# Altium PCB praline.PcbDoc (part 7 of 8)
Units mm, origin at the board's own origin, x right, y up, seen from the top; angles counter-clockwise.
Board outline 152.4 x 101.6 mm, 6 copper layers (In2.Cu, F.Cu, B.Cu, In1.Cu, In3.Cu, In4.Cu); 581 components, 490 nets, 2812 pads, 953 vias.
Unrouted connection lines stored in the file: 404.
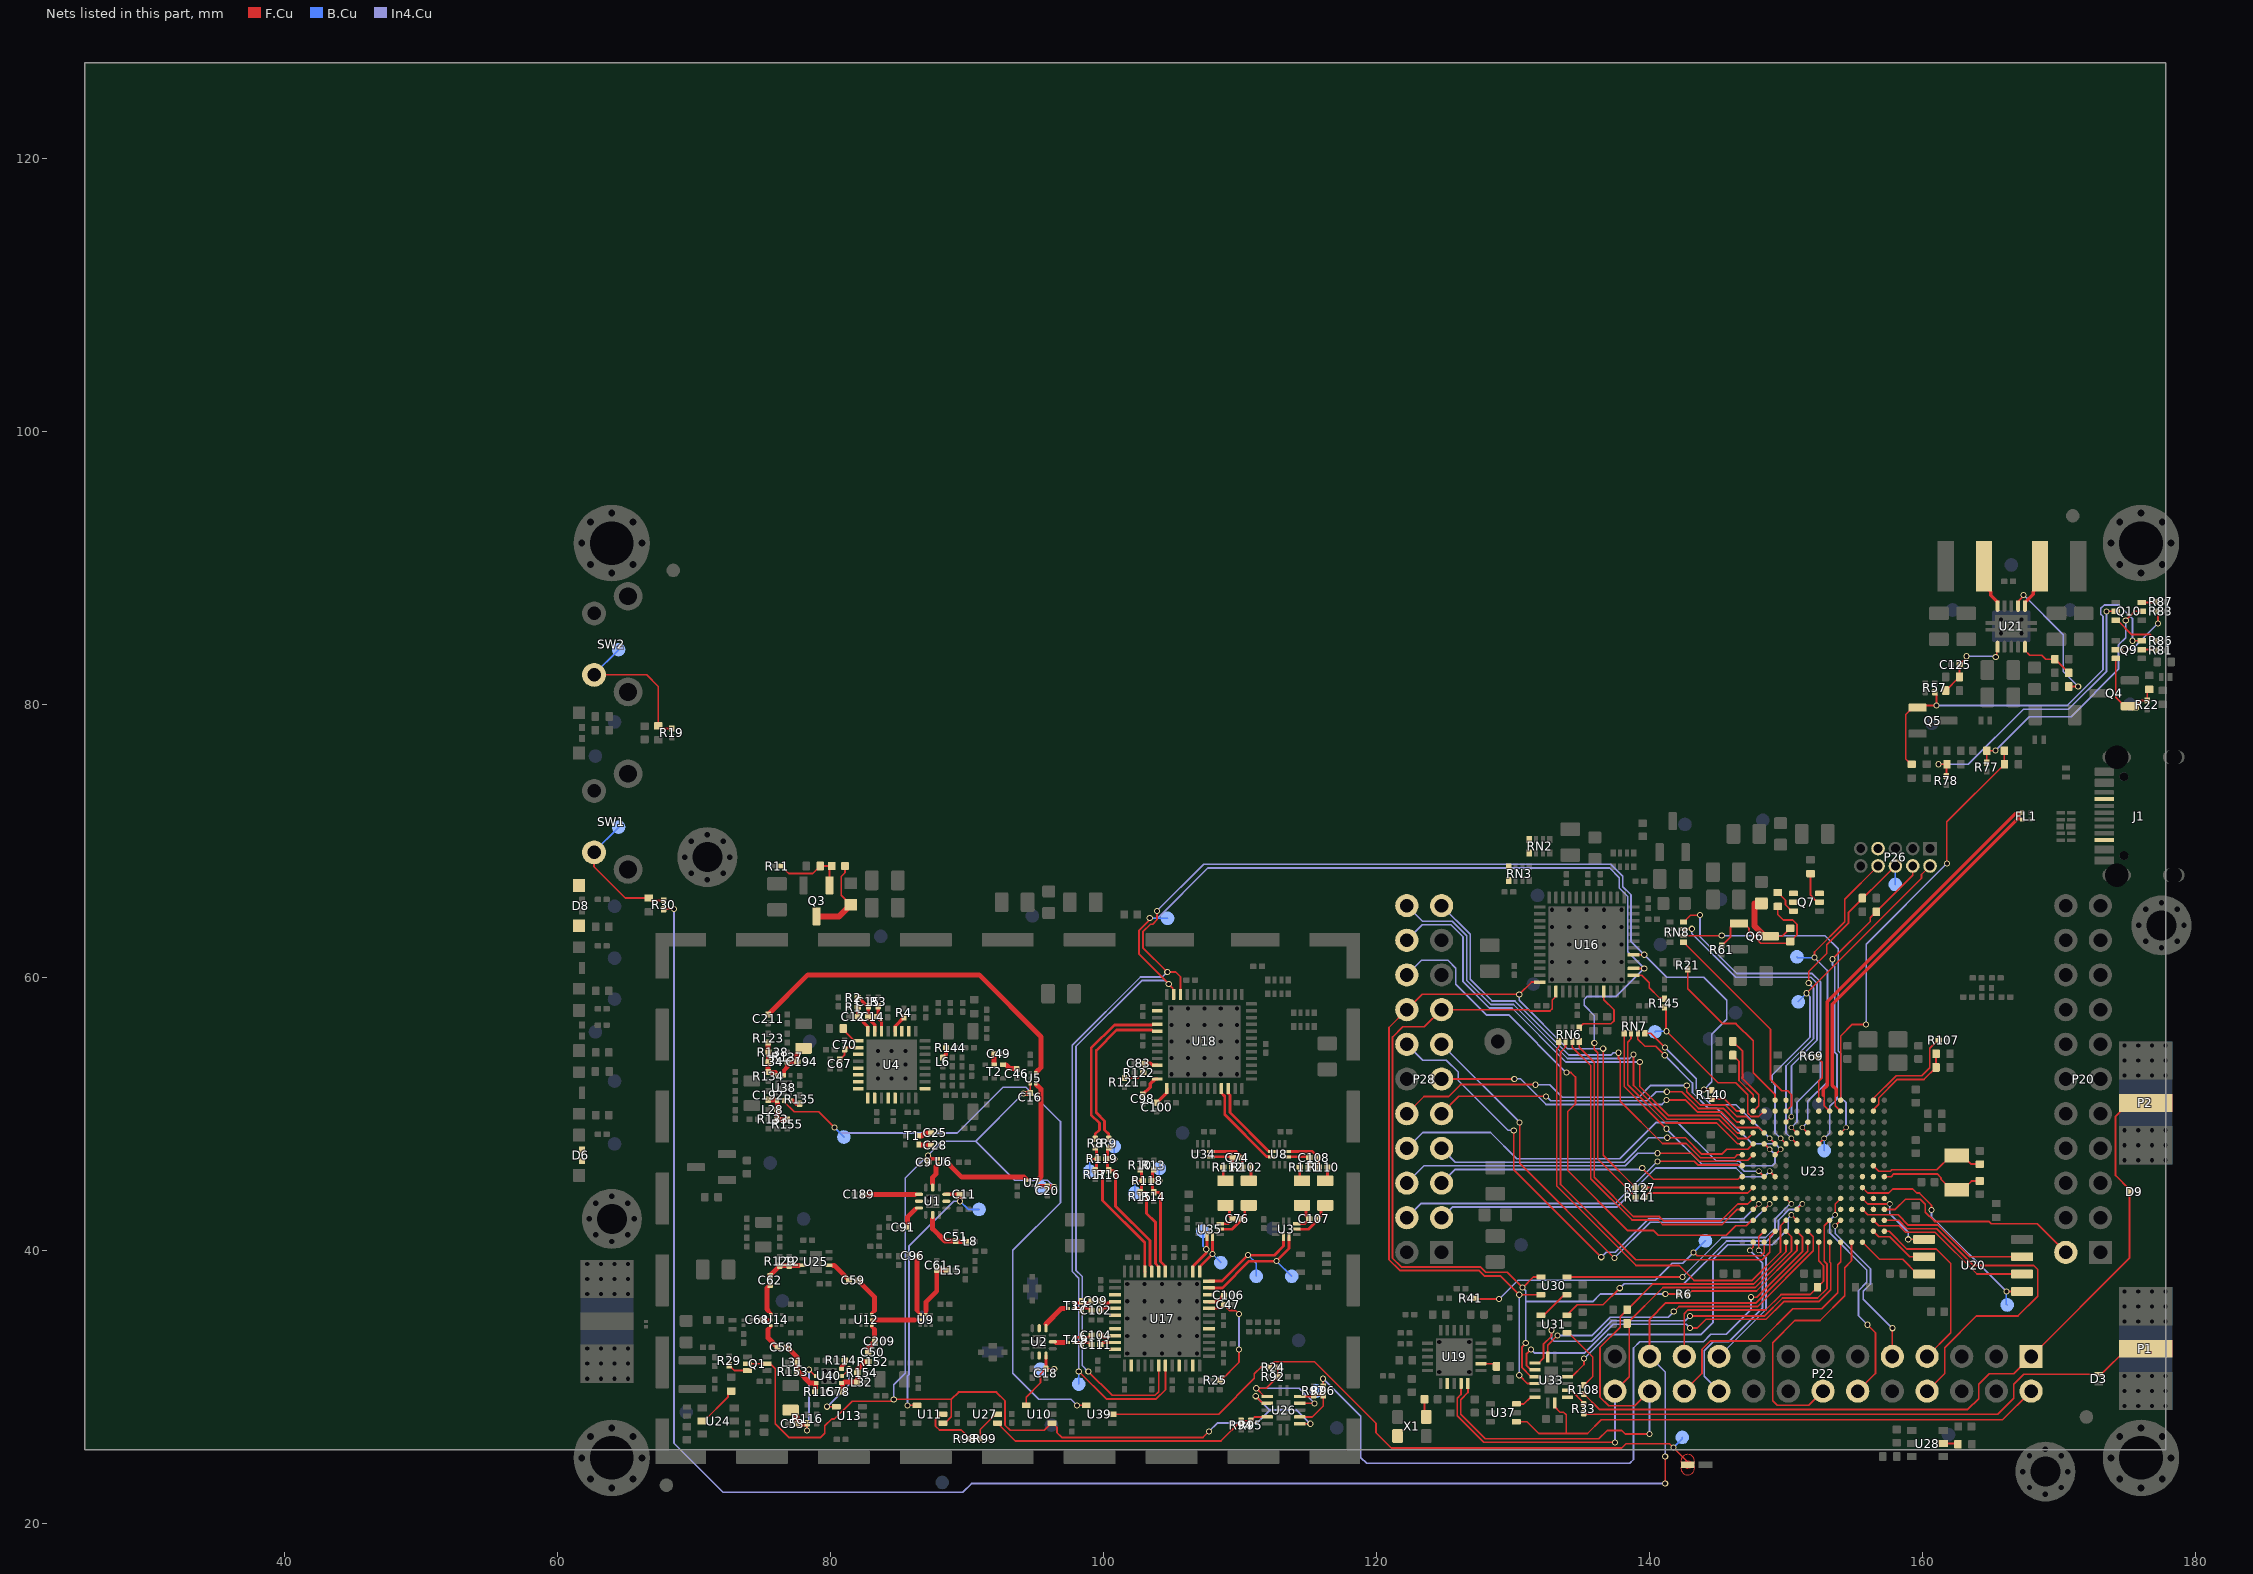
[diagram p9: the nets of this part, all layers, seen from the top]

## Via types
v1: diameter 0.45, hole 0.3, F.Cu to B.Cu, tented both sides, 751 vias
v2: diameter 0.4, hole 0.3, F.Cu to B.Cu, tented both sides, 119 vias
v3: diameter 0.7, hole 0.4, F.Cu to B.Cu, tented both sides, 83 vias

## Nets (pads, with @x,y where several pads share a name; then routed paths per layer and width w, separated by ;. In a path a pad name is that pad's centre, name@x,y a point inside that pad or via, vN(x,y) a via of type N, cw(c..) or ccw(c..) an arc to the next point about the centre after c; other vN are vias at no path point) (continued)
Net-(L6-Pad1): L6.1 R144.2 | length 0.8
  F.Cu w0.3: L6.1@88.25,54.14 88.48,54.37 R144.2@88.48,54.87
Net-(L21-Pad1): L21.1 R110.2 | length 1.1
  F.Cu w0.203: L21.1@116.25,45.12 116.42,45.29 R110.2@116.42,46.12
Net-(L22-Pad1): L22.1 R111.2 | length 1.1
  F.Cu w0.203: R111.2@114.38,46.12 114.38,45.29 L22.1@114.55,45.12
Net-(L23-Pad1): L23.1 R102.2 | length 1.1
  F.Cu w0.203: L23.1@110.65,45.12 110.82,45.29 R102.2@110.82,46.12
Net-(L24-Pad1): L24.1 R112.2 | length 1.1
  F.Cu w0.203: R112.2@108.78,46.12 108.78,45.29 L24.1@108.95,45.12
Net-(Q1B-D): Q1.3 R29.2 | length 1.5
  F.Cu w0.127: R29.2@72.6,31.6 72.98,31.22 Q1.3@73.938,31.22
Net-(Q3-D): C153.2 FB3.1 Q3.3 | length 6.1
  F.Cu w0.127: C153.2@81.08,68.17 81.08,67.68 80.8,67.4 80.8,66.032 FB3.1@81.5,65.333
  F.Cu w0.45: Q3.3@79,64.482 80.65,64.482 FB3.1@81.5,65.333
Net-(Q3-G): C153.1 Q3.1 R11.2 R60.1 | length 5.7
  F.Cu w0.127: R11.2@76.42,68.17 76.97,67.62 78.71,67.62 R60.1@79.26,68.17 C153.1@80.12,68.17 ; Q3.1@79.95,66.757 79.95,68 C153.1@80.12,68.17 ; C153.1@80.15,68.14 C153.1@80.12,68.17
Net-(Q4-G): Q4.1 Q9.6 R22.1 R58.2 | length 6.5
  F.Cu w0.127: Q9.6@174.15,83.37 174.15,80.52 174.8,79.87 Q4.1@175.175,79.87 175.6,79.87 176.02,80.29 R22.1@176.45,80.29 176.45,80.96 R58.2@176.6,81.11
Net-(Q5-G): Q5.1 Q9.3 R57.1 R70.2 | length 30.4
  F.Cu w0.127: R70.2@159.2,75.63 159.15,75.63 158.77,76.01 158.77,79.265 159.275,79.77 Q5.1@159.625,79.77 159.785,79.93 v1(161.02,79.93) 161.02,80.78 R57.1@160.9,80.9 ; v1(175.37,84.67) Q9.3@176.05,84.67
  In4.Cu w0.127: v1(161.02,79.93) 170.61,79.93 173.22,82.54 173.22,86.45 173.06,86.61 173.06,87.04 173.31,87.29 174.38,87.29 175.37,86.3 v1(175.37,84.67)
Net-(Q6-D): C180.2 FB4.1 Q6.3 | length 4.8
  F.Cu w0.127: Q6.3@148.838,63.02 149.72,63.02 C180.2@150.3,63.6
  F.Cu w0.45: 147.7,65.433 147.7,63.77 148.45,63.02 Q6.3@148.838,63.02
Net-(Q6-G): C180.1 Q6.1 R61.2 R71.1 | length 10.6
  F.Cu w0.127: R61.2@145.3,62.34 145.94,62.98 145.94,63.7 146.21,63.97 Q6.1@146.562,63.97 146.94,63.97 147.29,63.62 147.29,63.39 148.16,62.52 150.18,62.52 C180.1@150.3,62.64 150.81,63.15 150.81,63.89 150.48,64.22 149.8,64.22 149.4,64.62 R71.1@149.4,65.21
Net-(Q7A-B1): Q7.2 R53.2 | length 2.4
  F.Cu w0.127: R53.2@151.8,67.61 151.8,66.02 152.3,65.52 Q7.2@152.45,65.52
Net-(Q7A-C1): Q7.6 R71.2 | length 1.9
  F.Cu w0.127: R71.2@149.4,66.23 149.96,65.67 149.96,65.33 150.42,64.87 Q7.6@150.55,64.87
Net-(Q9A-B1): Q9.2 R81.1 | length 1.1
  F.Cu w0.127: Q9.2@176.05,84.02 177.08,84.02 R81.1@177.13,83.97
Net-(Q9B-B2): Q9.5 R83.1 | length 4.8
  F.Cu w0.127: Q9.5@174.15,84.02 v1(174.82,84.02) ; R83.1@177.13,86.82 177.25,86.7 v1(177.25,85.92)
  In4.Cu w0.127: v1(174.82,84.02) 175.31,84.02 177.21,85.92 v1(177.25,85.92)
Net-(Q10A-B1): Q10.2 R77.1 R79.1 | length 18.2
  F.Cu w0.127: R77.1@164.7,75.74 164.7,76.61 R79.1@164.71,76.62 v1(165.33,76.62) ; v1(174.88,86.16) 175.54,86.82 Q10.2@176.05,86.82
  In4.Cu w0.127: v1(165.33,76.62) 167.82,79.11 170.88,79.11 174.344,82.574 174.344,84.354 174.88,84.89 v1(174.88,86.16)
Net-(Q10A-C1): Q10.6 R86.2 | length 3.6
  F.Cu w0.127: Q10.6@174.15,86.17 174.28,86.17 175.33,85.12 176.68,85.12 R86.2@177.13,84.67
Net-(Q10B-B2): Q10.5 R78.1 R80.1 | length 21.7
  F.Cu w0.127: v1(161.17,75.62) R80.1@161.79,75.62 161.75,75.58 R78.1@161.75,74.74 ; v1(173.48,86.82) Q10.5@174.15,86.82
  In4.Cu w0.127: v1(161.17,75.62) 163.36,75.62 167.39,79.65 170.69,79.65 173.48,82.44 v1(173.48,86.82)
Net-(Q10B-C2): Q10.3 R87.2 | length 1.1
  F.Cu w0.127: Q10.3@176.05,87.47 177.08,87.47 R87.2@177.13,87.52
Net-(R19-Pad2): R19.2 R49.2 SW2.1 TP30.1 | length 11.6
  F.Cu w0.127: SW2.1@62.7,82.17 66.55,82.17 67.4,81.32 R49.2@67.4,78.43 67.59,78.24 R19.2@68.4,78.24
  B.Cu w0.127: SW2.1@62.7,82.17 62.7,82.22 TP30.1@64.5,84.02
Net-(R24-Pad2): R24.2 R92.1 U26.2 U26.12 | length 9.5
  F.Cu w0.127: U26.2@112.012,29.32 111.8,29.32 v1(111.2,29.92) 111.924,29.92 112.77,30.766 R92.1@112.77,30.77 R24.2@112.77,31.47 ; U26.12@114.388,28.82 115.46,28.82 v1(115.47,28.81)
  In4.Cu w0.127: v1(111.2,29.92) 114.36,29.92 v1(115.47,28.81)
Net-(R30-Pad2): R7.1 R30.2 SW1.1 TP31.1 | length 9.8
  F.Cu w0.127: SW1.1@62.7,69.17 62.7,68.12 64.99,65.83 R7.1@66.7,65.83 66.89,65.64 R30.2@67.8,65.64
  B.Cu w0.127: SW1.1@62.7,69.17 62.7,69.22 TP31.1@64.5,71.02
Net-(R94-Pad2): R94.2 R95.1 U26.5 U27.1 | length 21
  F.Cu w0.127: U27.1@92.25,27.37 93.56,26.06 108.61,26.06 110.09,27.54 R94.2@110.1,27.54 R95.1@110.8,27.54 111.08,27.82 U26.5@112.012,27.82
Net-(R96-Pad2): R96.2 R97.1 U26.10 U26.13 | length 4.6
  F.Cu w0.127: U26.10@114.388,27.82 115.3,27.82 116.1,28.62 R96.2@116.1,29.4 R97.1@115.4,29.4 115.32,29.32 U26.13@114.388,29.32
Net-(R98-Pad2): R98.2 R99.1 U11.2 U27.2 | length 7.3
  F.Cu w0.127: U11.2@88.25,28.02 88.1,28.02 87.71,27.63 87.71,27.15 88,26.86 89.59,26.86 90.22,26.23 R98.2@90.22,26.22 R99.1@90.98,26.22 90.98,26.9 92.1,28.02 U27.2@92.25,28.02
Net-(R108-Pad2): R108.2 U31.4 | length 5
  F.Cu w0.127: U31.4@133.95,33.97 134.08,33.97 135.84,32.21 135.84,30.78 R108.2@135.2,30.14
Net-(T1-S1): C28.1 T1.1 | length 0.7
  F.Cu w0.364: 86.67,47.72 C28.1@87.38,47.72
Net-(T1-S2): C25.1 T1.2 | length 0.8
  F.Cu w0.364: 86.68,48.39 86.91,48.62 C25.1@87.38,48.62
Net-(T2-S1): C46.2 T2.1 | length 0.9
  F.Cu w0.364: 92.88,53.6 93.14,53.34 C46.2@93.65,53.34
Net-(T2-S2): C49.2 T2.2 | length 0.6
  F.Cu w0.364: 92,53.79 92,54.39 C49.2@92.03,54.42
Net-(U1-RF3): C51.1 L8.2 U1.11 | length 3.5
  F.Cu w0.364: 87.5,42.31 87.5,41.6 88.4,40.7 C51.1@89.2,40.7 89.23,40.67 L8.2@89.93,40.67
Net-(U1-RF4): C91.1 U1.9 | length 1.5
  F.Cu w0.364: C91.1@85.67,41.72 85.67,42.48 86.22,43.03
Net-(U3-D1+): C107.2 L22.2 U3.5 | length 2.3
  F.Cu w0.203: U3.5@114.168,41.97 114.73,41.97 C107.2@115.08,42.32 114.85,42.55 114.85,43.02 L22.2@114.55,43.32
Net-(U3-D1-): C107.1 L21.2 U3.4 | length 3.1
  F.Cu w0.203: U3.4@114.168,41.57 115.027,41.57 115.72,42.263 C107.1@115.72,42.32 115.95,42.55 115.95,43.02 L21.2@116.25,43.32
Net-(U4-LFILT1): C14.2 R3.1 U4.6 | length 2
  F.Cu w0.25: R3.1@83.5,57.9 83.5,57.2 C14.2@83.42,57.12 83.75,56.79 U4.6@83.75,56.07
Net-(U4-LFILT2): C14.1 C15.1 R2.1 U4.7 | length 3.1
  F.Cu w0.25: R2.1@82.02,58.52 82.08,58.52 82.7,57.9 C15.1@82.8,57.9 82.78,57.88 C14.1@82.78,57.12 82.78,57.029 83.25,56.559 U4.7@83.25,56.07
Net-(U4-LFILT3): C12.1 R1.2 U4.8 | length 2.1
  F.Cu w0.25: R1.2@82.02,57.82 C12.1@82.02,57.12 82.04,57.12 82.75,56.41 U4.8@82.75,56.07
Net-(U4-MODE{slash}GPO6): R120.2 U4.9 | length 1.5
  F.Cu w0.127: R120.2@80.96,56.27 80.96,56.17 81.76,55.37 U4.9@82.05,55.37
Net-(U4-REXT): R4.2 U4.4 | length 1.3
  F.Cu w0.25: U4.4@84.75,56.07 84.75,56.435 85.4,57.085 R4.2@85.4,57.1
Net-(U5-RF1): C211.1 U5.3 | length 25.8
  F.Cu w0.364: C211.1@75.45,57.29 78.36,60.2 90.9,60.2 95.45,55.65 95.45,53.42 U5.3@95.11,53.08
Net-(U8-D2+): C108.1 R110.1 U8.7 | length 3.2
  F.Cu w0.203: U8.7@113.469,47.27 115.327,47.27 115.72,46.877 C108.1@115.72,46.82 115.78,46.76 R110.1@115.78,46.12
Net-(U8-D2-): C108.2 R111.1 U8.6 | length 2.4
  F.Cu w0.203: U8.6@113.469,46.87 115.03,46.87 C108.2@115.08,46.82 115.02,46.76 R111.1@115.02,46.12
Net-(U9-RF1): C96.2 U9.3 | length 4.3
  F.Cu w0.25: 86.4,35.52 U9.3@86.6,35.32
  F.Cu w0.364: 86.34,35.65 86.34,39.59 C96.2@86.37,39.62
Net-(U9-RF3): C61.1 L15.1 U9.2 | length 4.4
  F.Cu w0.25: U9.2@87,35.32 87,35.62
  F.Cu w0.364: 87,35.62 87,36.23 87.8,37.03 C61.1@87.8,38.6 87.83,38.57 L15.1@88.53,38.57
Net-(U14-ANT): C68.1 U14.4 | length 0.7
  F.Cu w0.25: 75.35,34.92 U14.4@75.65,34.92
  F.Cu w0.364: C68.1@74.97,34.92 75.35,34.92
Net-(U16B-IOB_32a_SPI_SO): R145.2 U16.14 | length 3.2
  F.Cu w0.127: U16.14@138.837,60.17 139.43,60.17 139.985,59.615 139.985,59.245 140.73,58.5 141.04,58.5 R145.2@141.1,58.44
Net-(U17-BYPASS): C106.1 U17.33 | length 1.3
  F.Cu w0.25: U17.33@107.737,36.27 108.34,36.27 108.79,36.72 C106.1@108.83,36.72
Net-(U18-REFIN): C83.1 R121.2 R122.1 U18.46 | length 3.3
  F.Cu w0.127: R121.2@101.55,52.64 101.56,52.63 102.54,52.63 102.92,53.01 R122.1@102.92,53.02 C83.1@102.92,53.72
  F.Cu w0.25: C83.1@102.92,53.72 103.453,53.72 103.603,53.57 U18.46@103.95,53.57
Net-(U21-ADJ2): C125.2 R46.2 R47.2 U21.1 | length 6.1
  F.Cu w0.127: R46.2@161.69,81.02 162.68,82.01 162.68,82.02 R47.2@162.71,82.05 ; R47.2@162.71,82.02 162.71,82.91 C125.2@162.72,82.92 162.72,82.94 163.22,83.44 v1(163.22,83.53) ; v1@165.43,83.51 165.43,84.15 U21.1@165.5,84.22
  In4.Cu w0.127: v1(163.22,83.53) 165.33,83.53 165.36,83.5 v1(165.36,83.48)
Net-(U21-DEF_1): R55.2 R56.2 U21.5 | length 4.2
  F.Cu w0.127: U21.5@167.5,84.22 167.5,83.95 167.84,83.61 168.74,83.61 169.03,83.32 R55.2@169.69,83.32 169.71,83.32 R56.2@170.71,82.32
Net-(U21-EN1): R52.2 U21.7 | length 10
  F.Cu w0.127: U21.7@167,87.195 167,87.56 167.4,87.96 v1(167.4,88.02) ; R52.2@170.71,81.32 v1(171.4,81.32)
  In4.Cu w0.127: v1(167.4,88.02) 170.3,85.12 170.3,82.42 v1(171.4,81.32)
Net-(U21-SW1): L11.2 U21.6 | length 3.4
  F.Cu w0.25: U21.6@167.5,87.195 167.5,87.445 168.12,88.065 168.12,88.26 168.6,88.74 L11.2@168.6,90.12
Net-(U21-SW2): L10.1 U21.10 | length 3.1
  F.Cu w0.25: L10.1@164.5,90.12 164.5,88.74 164.98,88.26 164.98,88 U21.10@165.5,87.48
Net-(U23-P1_4): R140.1 U23.P2 | length 2.6
  F.Cu w0.127: R140.1@144.55,51.1 145.52,51.1 146.4,50.22 U23.P2@146.8,50.22
Net-(U23-P1_19): R141.1 U23.N9 | length 8.3
  F.Cu w0.127: R141.1@139.62,43.92 139.92,44.22 147.2,44.22 U23.N9@147.6,44.62
Net-(U23-P2_6): R6.1 U23.J14 | length 9.9
  F.Cu w0.127: R6.1@142.82,36.82 142.87,36.82 143.09,37.04 147.839,37.04 150.8,40.001 U23.J14@150.8,40.62
Net-(U23-P4_3): R37.1 R82.2 U23.B2 | length 7.2
  F.Cu w0.127: U23.B2@156.4,50.22 156.4,50.331 156.8,50.731 156.8,51.18 158.16,52.54 160.11,52.54 R82.2@160.99,53.42 R37.1@160.99,54.42
Net-(U23-P4_6): R107.1 U23.B1 | length 7.5
  F.Cu w0.127: U23.B1@156.4,51.02 156.4,51.139 158.061,52.8 159.929,52.8 160.52,53.391 160.52,54.81 161.13,55.42 R107.1@161.18,55.42
Net-(U23-PD_12): R127.2 U23.P9 | length 7.2
  F.Cu w0.127: R127.2@139.62,44.62 U23.P9@146.8,44.62
Net-(U24-ILIM): R20.1 U24.5 | length 3.1
  F.Cu w0.127: U24.5@70.64,27.52 70.75,27.52 72.505,29.275 72.505,29.465 R20.1@72.75,29.71
Net-(U25-RFIN): C59.2 U25.2 | length 1.6
  F.Cu w0.364: 80.2,38.92 80.28,38.92 C59.2@81.38,37.82
Net-(U25-RFOUT): C62.1 L12.2 R129.1 U25.7 | length 2.5
  F.Cu w0.364: C62.1@75.6,38.14 75.6,38.2 R129.1@76.3,38.9 L12.2@77,38.9 77.71,38.9
Net-(U28-ILIM): R101.1 U28.5 | length 1.1
  F.Cu w0.127: U28.5@161.52,25.87 162.54,25.87 R101.1@162.59,25.82
Net-(U30-Pad4): U30.4 U31.1 | length 2.5
  F.Cu w0.127: U31.1@132.05,35.27 132.26,35.27 133.76,36.77 U30.4@133.95,36.77
Net-(U33-A): R33.1 U33.3 | length 1.7
  F.Cu w0.127: U33.3@133.988,29.77 134.26,29.77 135.2,28.83 R33.1@135.2,28.74
Net-(U34-D2+): C74.1 R102.1 U34.7 | length 3.2
  F.Cu w0.203: U34.7@107.868,47.27 109.727,47.27 110.12,46.877 C74.1@110.12,46.82 110.18,46.76 R102.1@110.18,46.12
Net-(U34-D2-): C74.2 R112.1 U34.6 | length 2.4
  F.Cu w0.203: U34.6@107.868,46.87 109.43,46.87 C74.2@109.48,46.82 109.42,46.76 R112.1@109.42,46.12
Net-(U35-D1+): C76.2 L24.2 U35.5 | length 2.3
  F.Cu w0.203: U35.5@108.569,41.97 109.13,41.97 C76.2@109.48,42.32 109.25,42.55 109.25,43.02 L24.2@108.95,43.32
Net-(U35-D1-): C76.1 L23.2 U35.4 | length 3.1
  F.Cu w0.203: U35.4@108.569,41.57 109.427,41.57 110.12,42.263 C76.1@110.12,42.32 110.35,42.55 110.35,43.02 L23.2@110.65,43.32
Net-(U38-ADJ): R135.1 U38.6 | length 0.8
  F.Cu w0.3: U38.6@77.1,50.995 77.275,50.995 77.52,50.75 R135.1@77.75,50.75
Net-(U38-BIAS): C194.1 L33.1 R137.2 U38.2 | length 3
  F.Cu w0.3: U38.2@76.6,52.845 76.6,53.19 76.85,53.44 R137.2@76.85,53.85
  F.Cu w0.364: R137.2@76.85,53.85 76.88,53.82 C194.1@77.58,53.82 77.58,54.35 L33.1@78.05,54.82
Net-(U38-RFIN): L34.2 R123.1 R134.1 R138.1 U38.3 | length 2.7
  F.Cu w0.364: R123.1@75.45,55.25 75.45,54.55 R138.1@75.48,54.52 L34.2@75.48,53.82 75.45,53.79 R134.1@75.45,53.09 75.49,53.05 75.99,53.05
Net-(U38-RFOUT): C192.1 L28.2 R133.1 R155.1 U38.4 | length 2.4
  F.Cu w0.364: C192.1@75.45,51.05 75.48,51.02 75.94,51.02 ; 76.12,50.81 L28.2@76.12,50.32 R133.1@76.12,49.62 76.82,49.62 R155.1@76.85,49.59
Net-(U40-ADJ): R114.1 U40.6 | length 0.8
  F.Cu w0.3: U40.6@80.825,31.32 80.825,31.497 81.07,31.742 R114.1@81.07,31.97
Net-(U40-BIAS): C53.1 L4.1 R116.2 U40.2 | length 7.6
  F.Cu w0.127: v1(78.3,26.82) R116.2@78.3,27.35 ; v1(78.44,31.28) U40.2@78.9,30.82
  F.Cu w0.364: L4.1@77.1,28.32 77.57,27.85 C53.1@77.57,27.32 78.27,27.32 R116.2@78.3,27.35
  In4.Cu w0.127: v1(78.3,26.82) 78.3,27.27 78.44,27.41 v1(78.44,31.28)
Net-(U40-RFIN): C58.2 L31.2 R115.1 R153.1 U40.3 | length 4.2
  F.Cu w0.364: C58.2@76.77,32.92 76.85,32.92 77.57,32.2 L31.2@77.57,31.82 R153.1@77.57,31.12 77.68,31.12 78.48,30.32 78.78,30.32 ; R115.1@78.88,29.67 78.92,29.71 78.92,30.16
Net-(U40-RFOUT): C78.1 L32.2 R152.2 R154.1 U40.4 | length 3.4
  F.Cu w0.364: 80.88,30.16 80.88,29.71 C78.1@80.92,29.67 ; 81.05,30.37 L32.2@81.98,30.37 R154.1@81.98,31.07 81.98,31.3 82.55,31.87 R152.2@82.78,31.87
Net-(X1-OUT): C155.2 X1.3 | length 1.4
  F.Cu w0.127: C155.2@123.52,29.12 123.52,27.95 X1.3@123.65,27.82
OEB: R105.2 U19.7 | length 1.2
  F.Cu w0.127: U19.7@127.65,31.72 128.59,31.72 R105.2@128.79,31.52
P1: D3.1 P1.1 R33.2 | length 43.8
  F.Cu w0.127: R33.2@135.2,28.1 135.28,28.02 165.5,28.02 166.68,29.2 166.68,30.22 167.405,30.945 D3.1@172.9,30.945 173.095,30.945 174.97,32.82 P1.1@176.35,32.82
P1_1: R67.1 U23.N1 | length 3.9
  F.Cu w0.127: R67.1@146.11,54.32 146.56,53.87 146.56,52.46 147.6,51.42 U23.N1@147.6,51.02
P1_2: R68.1 U23.N2 | length 6
  F.Cu w0.127: R68.1@146.11,55.32 146.82,54.61 146.82,52.6 148,51.42 148,50.62 U23.N2@147.6,50.22
P1_7: P28.22 U23.N4 | length 36.1
  F.Cu w0.127: v1(138.83,54.36) 138.83,52.1 141.31,49.62 145.082,49.62 146.482,48.22 147.2,48.22 U23.N4@147.6,48.62
  In4.Cu w0.127: P28.22@122.23,65.27 123.38,64.12 125.56,64.12 126.61,63.07 126.61,59.787 128.367,58.03 130.04,58.03 134,54.07 138.54,54.07 v1(138.83,54.36)
P1_CLKIN: U33.15 U37.3 | length 1.6
  F.Cu w0.127: U37.3@130.25,28.77 130.8,28.77 131.3,29.27 U33.15@131.613,29.27
P1_CTRL0: U23.F14 U33.11 | length 29.8
  F.Cu w0.127: v1(131.31,32.77) 131,32.46 131,31.58 131.31,31.27 U33.11@131.613,31.27 ; v1(142.968,34.338) 143.508,34.338 144.136,34.966 148.536,34.966 149.84,36.27 152.41,36.27 153.27,37.13 153.27,39.098 153.2,39.168 U23.F14@153.2,40.62
  In4.Cu w0.127: v1(131.31,32.77) 131.57,32.51 135.26,32.51 137.356,34.606 142.7,34.606 v1(142.968,34.338)
P1_CTRL1: U23.F12 U33.10 | length 31
  F.Cu w0.127: U33.10@131.87,31.77 U33.10@131.613,31.77 131.89,31.77 132.23,32.11 132.23,33.15 132.82,33.74 v1(132.82,34.17) ; v1(142.98,35.22) 148.43,35.22 149.74,36.53 152.31,36.53 153.01,37.23 153.01,38.999 152.8,39.209 152.8,41.82 U23.F12@153.2,42.22
  In4.Cu w0.127: v1(132.82,34.17) 132.82,33.56 133.01,33.37 135.76,33.37 137.25,34.86 142.62,34.86 v1(142.98,35.22)
P1_CTRL2: U23.H13 U33.9 | length 24.8
  F.Cu w0.127: U33.9@132.55,32.207 132.55,33.08 v1(133.26,33.79) ; v1(141.78,35.53) 142.16,35.91 147.916,35.91 152,39.994 152,41.02 U23.H13@151.6,41.42
  In4.Cu w0.127: v1(133.26,33.79) 135.81,33.79 137.14,35.12 141.37,35.12 v1(141.78,35.53)
P2: D9.1 P2.1 P22.1 R108.1 | length 59.1
  F.Cu w0.127: R108.1@135.2,29.5 136.33,28.37 163.32,28.37 164.11,29.16 164.11,30.21 164.89,30.99 166.69,30.99 P22.1@167.95,32.25 175.15,39.45 175.15,44.32 175.15,44.49 174.14,45.5 174.14,49.85 175.11,50.82 P2.1@176.35,50.82
P2_5: U23.J12 U33.5 | length 25.3
  F.Cu w0.127: U33.5@133.988,30.77 134.31,30.77 135.2,31.66 v1(135.2,32.09) ; v2(150.4,42.62) U23.J12@150.8,42.22
  In4.Cu w0.127: v1(135.2,32.09) 136.96,33.85 143.762,33.85 144.66,34.748 144.66,39.361 145.739,40.44 149,40.44 150.17,41.61 150.17,42.39 v2(150.4,42.62)
P2_8: P22.23 R30.1 U23.H14 | length 141.1
  F.Cu w0.127: R30.1@67.8,65 67.82,65.02 v1(68.55,65.02) ; P22.23@140.01,32.25 140.01,34.98 141.2,36.17 147.81,36.17 151.6,39.96 U23.H14@151.6,40.62 ; v1(141.15,22.94) v1(141.15,24.93)
  In4.Cu w0.127: v1(68.55,65.02) 68.56,65.01 68.56,25.89 72.14,22.31 89.71,22.31 90.34,22.94 v1(141.15,22.94) ; P22.23@140.01,32.25 141.15,31.11 v1(141.15,24.93)
P2_9: P22.21 R93.1 U23.G14 | length 17.3
  F.Cu w0.127: P22.21@142.55,32.25 142.55,35.39 142.81,35.65 148.5,35.65 149.64,36.79 151.78,36.79 R93.1@152.31,37.32 152.75,37.76 152.75,38.9 152.4,39.25 U23.G14@152.4,40.62
P2_13: P22.22 U23.E14 | length 19
  F.Cu w0.127: P22.22@142.55,29.71 143.84,31 143.84,32.76 144.46,33.38 148.13,33.38 150.5,35.75 152.62,35.75 153.784,36.914 153.784,38.974 154,39.19 U23.E14@154,40.62
P2_CTRL0: U23.K10 U30.6 | length 19.6
  F.Cu w0.127: U30.6@133.95,38.07 v1(142.42,38.07) ; U23.K10@150,43.82 v2(150.4,43.42)
  In4.Cu w0.127: v1(142.42,38.07) 145.31,40.96 148.5,40.96 149.2,41.66 149.2,42.34 150.28,43.42 v2(150.4,43.42)
P2_CTRL1: U23.J11 U31.6 | length 21.8
  F.Cu w0.127: U31.6@134.15,35.27 U31.6@133.95,35.27 134.71,36.03 136.6,36.03 v1(137.82,37.25) ; U23.J11@150.8,43.02 v2(151.2,43.42)
  In4.Cu w0.127: v1(137.82,37.25) 138.14,37.57 142.51,37.57 145.64,40.7 148.6,40.7 149.454,41.554 149.454,42.23 150.244,43.02 150.68,43.02 151.08,43.42 v2(151.2,43.42)
P5_3: P28.21 U23.P6 | length 33.8
  F.Cu w0.127: v1(137.73,54.49) 137.73,54.08 137.86,53.95 137.86,50.94 140.95,47.85 142.7,47.85 143.74,46.81 146.231,46.81 146.441,47.02 U23.P6@146.8,47.02
  In4.Cu w0.127: P28.21@124.77,65.27 126.87,63.17 126.87,59.886 128.472,58.284 130.146,58.284 134.1,54.33 137.19,54.33 137.35,54.49 v1(137.73,54.49)
P5_6: P28.13 U23.M11 | length 34.5
  F.Cu w0.127: v1(130.49,49.39) 130.49,46.4 v1(137.43,39.46) ; U23.M11@148.4,43.02 v2(148.8,43.42)
  In4.Cu w0.127: P28.13@124.77,55.11 v1(130.49,49.39) ; v1(137.43,39.46) 140.05,42.08 147.46,42.08 v2(148.8,43.42)
P5_7: P28.14 U23.N11 | length 36.5
  F.Cu w0.127: v1(130.06,48.81) 130.06,45.93 v1(136.47,39.52) ; U23.N11@147.6,43.02 v2(148,43.42)
  In4.Cu w0.127: P28.14@122.23,55.11 123.39,53.95 125.12,53.95 125.99,53.08 125.99,52.46 129.64,48.81 v1(130.06,48.81) ; v1(136.47,39.52) 136.84,39.89 137.5,39.89 139.944,42.334 146.914,42.334 v2(148,43.42)
P9_1: P28.20 U23.P4 | length 34.3
  F.Cu w0.127: v1(139.29,53.81) 139.29,52.02 141.42,49.89 145.171,49.89 146.441,48.62 U23.P4@146.8,48.62
  In4.Cu w0.127: P28.20@122.23,62.73 123.36,63.86 125.46,63.86 126.35,62.97 126.35,59.688 128.266,57.772 129.928,57.772 133.89,53.81 v1(139.29,53.81)
P22_CLKIN: P22.2 U33.1 U37.1 | length 42.1
  F.Cu w0.127: U37.1@130.25,27.47 131.03,27.47 131.89,26.61 133.9,26.61 ; U33.1@133.05,28.833 133.05,28.57 133.45,28.17 133.7,28.17 133.9,27.97 133.9,26.61 ; P22.2@167.95,29.71 165.86,27.62 136.47,27.62 135.46,26.61 133.9,26.61
PA_3: P22.12 U23.E10 | length 16.9
  F.Cu w0.127: v2(153.6,42.62) 153.6,43.42 U23.E10@154,43.82 ; P22.12@155.25,29.71 156.55,31.01 156.55,33.99 v1(155.97,34.57)
  In4.Cu w0.127: v2(153.6,42.62) 153.2,42.22 153.2,41.3 155.92,38.58 155.92,37.682 155.308,37.07 155.308,35.232 v1(155.97,34.57)
PA_4: P22.9 U23.E12 | length 12.3
  F.Cu w0.127: v2(153.6,41.82) U23.E12@154,42.22 ; P22.9@157.79,32.25 v1(157.79,34.32)
  In4.Cu w0.127: v2(153.6,41.82) 153.6,41.259 156.19,38.669 156.19,37.56 155.66,37.03 155.66,36.45 v1(157.79,34.32)
PB_0: P22.14 U23.D14 | length 19.3
  F.Cu w0.127: P22.14@152.71,29.71 151.67,28.67 149.36,28.67 149.024,29.006 149.024,33.264 150.64,34.88 152.49,34.88 154.3,36.69 154.3,38.76 154.8,39.26 U23.D14@154.8,40.62
PB_1: P22.7 U23.A13 | length 13.4
  F.Cu w0.127: U23.A13@157.2,41.42 157.555,41.42 158.855,40.12 161,40.12 162.06,39.06 162.06,33.98 P22.7@160.33,32.25
PB_3: P22.8 U23.A12 | length 26.8
  F.Cu w0.127: U23.A12@157.2,42.22 158.25,42.22 158.86,41.61 161.03,41.61 163.72,38.92 168.13,38.92 168.43,38.62 168.43,36.66 166.99,35.22 163.95,35.22 161.62,32.89 161.62,31 P22.8@160.33,29.71
PB_5: P20.2 U23.A11 | length 15.6
  F.Cu w0.127: U23.A11@157.2,43.02 158,43.02 158.751,43.77 159.82,43.77 160.2,43.39 160.2,42.82 160.88,42.14 164.85,42.14 165.03,41.96 168.4,41.96 P20.2@170.49,39.87
PE_0: P28.18 U23.N12 | length 40.1
  F.Cu w0.127: v1(133.91,53.04) 134.25,53.04 134.58,52.71 134.58,50.75 134.02,50.19 134.02,45.87 138.42,41.47 140.3,41.47 140.65,41.12 145.62,41.12 146.32,41.82 147.08,41.82 147.48,42.22 U23.N12@147.6,42.22
  In4.Cu w0.127: P28.18@122.23,60.19 123.3,61.26 125.24,61.26 125.81,60.69 125.81,59.509 128.055,57.264 129.686,57.264 v1(133.91,53.04)
Q_INVERT: RN6.1 U16.9 | length 5.2
  F.Cu w0.127: RN6.1@134.85,56.32 135.15,56.62 137.18,56.62 137.41,56.85 137.41,57.62 136.65,58.38 U16.9@136.65,58.983
QA+: U8.1 U18.10 | length 6.1
  F.Cu w0.203: U18.10@109.15,51.87 109.15,51.517 109.269,51.398 109.269,50.118 112.117,47.27 U8.1@112.381,47.27
QA-: U8.2 U18.9 | length 6.7
  F.Cu w0.203: U18.9@108.65,51.87 108.65,51.55 108.891,51.309 108.891,49.962 111.961,46.892 112.31,46.892 U8.2@112.331,46.87
QD+: R8.1 U18.40 | length 12.2
  F.Cu w0.203: R8.1@99.4,48.19 99.4,48.535 99.711,48.846 99.711,49.342 99.111,49.942 99.111,54.828 100.812,56.529 U18.40@103.55,56.529
QD-: R9.1 U18.41 | length 11.5
  F.Cu w0.203: R9.1@100.4,48.19 100.4,48.535 100.089,48.846 100.089,49.498 99.489,50.098 99.489,54.672 100.968,56.151 U18.41@103.55,56.151
REF_IN: C67.2 C70.1 U4.10 | length 2
  F.Cu w0.127: C67.2@80.7,53.99 81.05,54.34 C70.1@81.05,54.75 81.17,54.87 U4.10@82.05,54.87
REFN: C98.1 U18.48 | length 1.7
  F.Cu w0.25: C98.1@102.96,51.44 C98.1@102.9,51.44 103.44,51.98 103.44,52.228 103.782,52.57 U18.48@103.95,52.57
REFP: C100.1 U18.1 | length 1.4
  F.Cu w0.25: C100.1@103.92,50.82 104.65,51.55 U18.1@104.65,51.87
RF: U9.4 U12.4 | length 3.5
  F.Cu w0.25: U12.4@83.05,34.92 83.41,34.92 ; 86.3,34.92 U9.4@86.6,34.92
  F.Cu w0.364: 83.32,34.92 86.16,34.92
RF_AMP_EN: R96.1 TP46.1 U23.J13 | length 54.5
  F.Cu w0.127: R96.1@116.1,30.04 v1(116.1,30.62) ; v1(147.43,36.59) 147.87,36.59 151.2,39.92 151.2,41.02 U23.J13@150.8,41.42
  In4.Cu w0.127: v1(116.1,30.62) 118.86,27.86 118.86,24.84 119.28,24.42 138.55,24.42 138.83,24.7 138.83,32.87 139.29,33.33 143.96,33.33 144.5,33.87 145.632,33.87 147.43,35.668 v1(147.43,36.59)
  B.Cu w0.127: TP46.1@115.6,29.72 116.1,30.22 v1(116.1,30.62)
RREF: R69.1 U23.G1 | length 3.5
  F.Cu w0.127: R69.1@152.22,54.22 152.655,53.785 152.655,52.665 152.4,52.41 U23.G1@152.4,51.02
RTCX1: C118.1 U23.A8 X3.2 | length 7.9
  F.Cu w0.127: U23.A8@157.2,45.42 157.7,45.42 157.9,45.62 161.07,45.62 161.35,45.34 161.35,45.22 162.1,44.47 X3.2@162.5,44.47 162.96,44.47 163.59,45.1 C118.1@164.2,45.1
RTCX2: C164.1 U23.B7 X3.1 | length 8.7
  F.Cu w0.127: U23.B7@156.4,46.22 156.8,45.82 157.654,45.82 157.754,45.92 161.03,45.92 162.08,46.97 X3.1@162.5,46.97 162.93,46.97 163.56,46.34 C164.1@164.2,46.34
RX_AMP_EN: U13.4 U40.5 | length 4.8
  F.Cu w0.127: v1(79.77,28.57) U13.4@80.45,28.57 ; U40.5@80.825,30.82 80.9,30.82 81.36,31.28 v1(81.36,31.31)
  In4.Cu w0.127: v1(79.77,28.57) 81.36,30.16 v1(81.36,31.31)
RX_AMP_IN: C58.1 U14.5 | length 2
  F.Cu w0.25: 75.45,34.22 75.65,34.42 U14.5@75.65,34.52
  F.Cu w0.364: 75.45,34.22 75.45,33.6 C58.1@76.13,32.92
RX_AMP_OUT: C50.1 C209.1 U12.3 | length 2.3
  F.Cu w0.25: U12.3@83.05,34.52 83.05,34.42 83.25,34.22
  F.Cu w0.364: C50.1@82.78,32.57 82.8,32.59 82.8,32.89 C209.1@83.28,33.37 ; C209.1@83.25,33.34 83.25,34.22
RX_EN: C9.2 C16.2 C20.2 Q1.2 Q1.5 TP35.1 U5.6 U6.6 U7.6 U10.1 U11.1 U26.3 U26.9 | length 96.9
  F.Cu w0.127: Q1.2@73.938,31.72 Q1.5@75.363,31.72 75.596,31.72 75.97,31.346 75.97,27.31 76.96,26.32 79.3,26.32 79.6,26.62 79.6,27.17 80.1,27.67 80.3,27.67 81.6,28.97 84.51,28.97 v1(84.65,29.11) 88.87,29.11 ; U11.1@88.25,27.37 88.4,27.37 88.87,27.84 88.87,29.11 ; C16.2@94.65,51.54 U5.6@94.65,52.22 ; v1(107.73,26.75) 107.3,26.32 96.96,26.32 96.61,26.67 96.61,27.06 96.3,27.37 U10.1@96.25,27.37 96.19,27.37 95.665,26.845 93.175,26.845 92.8,27.22 92.8,29.01 92.17,29.64 89.4,29.64 88.87,29.11 ; v1(111.16,29.34) 111.68,28.82 U26.3@112.012,28.82 ; U26.9@114.388,27.32 v1(115.16,27.32)
  F.Cu w0.25: C9.2@87.15,46.45 C9.2@87.17,46.47 ; v1(87.15,46.97) 87.4,46.72 U6.6@87.9,46.72 ; U7.6@95.2,44.77 C20.2@95.88,44.77
  F.Cu w0.364: v1(87.15,46.97) 87.15,46.49 C9.2@87.17,46.47 ; v1(94.15,51.52) 94.63,51.52 C16.2@94.65,51.54 ; C20.2@95.9,44.69 95.92,44.67 v1(96.4,44.67)
  In4.Cu w0.127: v1(84.65,29.11) 84.65,30.17 85.5,31.02 85.5,45.32 v1(87.15,46.97) 88.2,48.02 90.65,48.02 ; v1(94.15,51.52) 90.65,48.02 ; v1(96.4,44.67) 95.91,45.16 93.51,45.16 90.65,48.02 ; v1(107.73,26.75) 108.35,27.37 111.23,27.37 112.18,28.32 ; v1(111.16,29.34) 112.18,28.32 ; v1(115.16,27.32) 114.16,28.32 112.18,28.32
  B.Cu w0.127: TP35.1@95.436,44.616 95.49,44.67 v1(96.4,44.67)
RX_MIX_IN: U1.5 U6.1 | length 1.5
  F.Cu w0.364: 87.5,44.93 87.5,45.37 87.76,45.63 87.76,46.18 U6.1@87.84,46.26
RX_MIX_OUT: U5.1 U7.1 | length 7.1
  F.Cu w0.364: U5.1@95.11,52.16 95.441,51.829 95.441,45.411 U7.1@95.26,45.23
RX_XOR_LPF: C11.2 TP38.1 U1.3 U11.4 | length 20.6
  F.Cu w0.127: v1(85.65,28.67) U11.4@86.35,28.67
  F.Cu w0.25: U1.3@88.5,44.12 C11.2@89.48,44.12
  F.Cu w0.364: C11.2@89.48,44.12 89.5,44.1 v1(89.5,43.62)
  In4.Cu w0.127: v1(85.65,28.67) 85.65,30.81 85.76,30.92 85.76,40.33 89.05,43.62 v1(89.5,43.62)
  B.Cu w0.127: v1(89.5,43.62) 90.1,43.02 TP38.1@90.9,43.02
RX_XOR_MIX: C18.2 TP39.1 U2.3 U10.4 | length 5.9
  F.Cu w0.127: U10.4@94.35,28.67 94.35,29.27 95.4,30.32 95.4,30.96 95.78,31.34 C18.2@95.8,31.34 96.38,31.34 v1(96.4,31.32)
  F.Cu w0.25: C18.2@95.8,31.34 U2.3@95.8,32.32
  B.Cu w0.127: TP39.1@95.4,31.32 v1(96.4,31.32)
RXBB.I+: TP62.1 U17.38 U35.1 | length 4.4
  F.Cu w0.203: U17.38@106.55,38.457 106.55,38.83 107.54,39.82 v1(107.54,40.1) 107.6,40.16 U35.1@107.6,41.052
  B.Cu w0.127: TP62.1@107.3,41.42 107.3,40.34 v1(107.54,40.1)
RXBB.I-: TP63.1 U17.37 U35.2 | length 3.8
  F.Cu w0.203: U17.37@107.05,38.457 107.05,38.8 v1(108,39.75) U35.2@108,41.002
  B.Cu w0.127: v1(108,39.75) 108.6,39.15 TP63.1@108.6,39.12
RXBB.Q+: TP60.1 U3.1 U17.36 | length 9.1
  F.Cu w0.203: U17.36@107.737,37.77 108.683,37.77 v1(110.596,39.684) 110.62,39.66 112.53,39.66 113.2,40.33 U3.1@113.2,41.052
  B.Cu w0.127: v1(110.596,39.684) 111.2,39.08 TP60.1@111.2,38.12
RXBB.Q-: TP61.1 U3.2 U17.35 | length 9.5
  F.Cu w0.203: U17.35@107.737,37.27 108.717,37.27 110.678,39.231 v1(112.678,39.231) 113.6,40.153 U3.2@113.6,41.002
  B.Cu w0.127: v1(112.678,39.231) 113.789,38.12 TP61.1@113.8,38.12
RXIF: T3.2 U2.7 | length 1.9
  F.Cu w0.364: 95.8,34.63 96.94,35.77 97.23,35.77
RXIF+: C99.1 U17.4 | length 1.2
  F.Cu w0.203: C99.1@99.77,36.32 99.8,36.32 99.961,36.159 100.399,36.159 100.51,36.27 U17.4@100.863,36.27
RXIF-: C102.1 U17.5 | length 1.2
  F.Cu w0.203: C102.1@99.77,35.62 99.8,35.62 99.961,35.781 100.852,35.781 U17.5@100.863,35.77
RXIF_BALUN+: C102.2 L7.1 T3.3 | length 1.4
  F.Cu w0.203: 97.94,35.781 98.269,35.781 L7.1@98.4,35.65 98.531,35.781 98.969,35.781 C102.2@99.13,35.62
RXIF_BALUN-: C99.2 L7.2 T3.4 | length 1.4
  F.Cu w0.203: 97.94,36.159 98.269,36.159 L7.2@98.4,36.29 98.531,36.159 98.969,36.159 C99.2@99.13,36.32
SCL: P22.26 R28.2 U19.4 U23.K13 | length 39.9
  F.Cu w0.127: U19.4@126.2,30.27 126.2,29.47 125.92,29.19 125.92,27.911 127.871,25.96 v1(137.47,25.96) ; P22.26@137.47,29.71 138.52,30.76 138.52,34.51 R28.2@138.36,34.67 140.99,37.3 147.74,37.3 150.4,39.96 150.4,41.02 U23.K13@150,41.42
  In4.Cu w0.127: v1(137.47,25.96) P22.26@137.47,29.71
SCT_CLK: R41.1 TP32.1 U23.M14 | length 24.8
  F.Cu w0.127: R41.1@127.22,36.52 127.29,36.45 v1(128.98,36.45) ; v1(143.235,39.875) 143.49,39.62 148.18,39.62 148.4,39.84 U23.M14@148.4,40.62
  In4.Cu w0.127: v1(128.98,36.45) 130.37,37.84 140.43,37.84 141.67,39.08 142.44,39.08 v1(143.235,39.875)
  B.Cu w0.127: v1(143.235,39.875) 144.08,40.72 TP32.1@144.1,40.72
SD_CD: P28.3 U23.L8 | length 26.5
  F.Cu w0.127: v2(148.8,45.82) U23.L8@149.2,45.42
  In4.Cu w0.127: P28.3@124.77,42.41 125.55,43.19 137.6,43.19 140.46,46.05 146.34,46.05 146.97,45.42 148.4,45.42 v2(148.8,45.82)
SD_CLK: P28.11 U23.M4 | length 25.5
  F.Cu w0.127: P28.11@124.77,52.57 130.09,52.57 v1(130.1,52.58) ; v1(141.25,51.04) 142.61,51.04 143.49,50.16 145.26,50.16 146.4,49.02 148,49.02 U23.M4@148.4,48.62
  In4.Cu w0.127: v1(130.1,52.58) 130.55,52.58 132.42,50.71 140.92,50.71 v1(141.25,51.04)
SD_CMD: P28.9 U23.P3 | length 23.9
  F.Cu w0.127: P28.9@124.77,50.03 126.04,51.3 v1(132.43,51.3) ; v1(141.27,51.64) 142.37,51.64 143.594,50.416 145.404,50.416 146.4,49.42 U23.P3@146.8,49.42
  In4.Cu w0.127: v1(132.43,51.3) 132.76,50.97 139.82,50.97 140.49,51.64 v1(141.27,51.64) 141.26,51.65
SD_DAT0: P28.7 U23.N5 | length 24.8
  F.Cu w0.127: v1(141.3,48.27) 142.639,48.27 143.839,47.07 145.3,47.07 145.65,47.42 147.2,47.42 U23.N5@147.6,47.82
  In4.Cu w0.127: P28.7@124.77,47.49 125.78,46.48 138.14,46.48 139.93,48.27 v1(141.3,48.27)
SD_DAT1: P28.6 U23.N6 | length 26.7
  F.Cu w0.127: v1(140.59,47.13) 143.049,47.13 143.639,46.54 146.32,46.54 146.4,46.62 147.2,46.62 U23.N6@147.6,47.02
  In4.Cu w0.127: P28.6@122.23,44.95 123.49,46.21 138.23,46.21 139.15,47.13 v1(140.59,47.13)
SD_DAT2: P28.5 U23.P8 | length 22.9
  F.Cu w0.127: v1(139.47,46.04) 140.29,45.22 146.48,45.22 146.68,45.42 U23.P8@146.8,45.42
  In4.Cu w0.127: P28.5@124.77,44.95 125.77,45.95 139.38,45.95 v1(139.47,46.04)
SD_DAT3: P28.4 U23.P7 | length 26.4
  F.Cu w0.127: v1(140.59,46.54) 143.28,46.54 143.54,46.28 146.74,46.28 U23.P7@146.8,46.22
  In4.Cu w0.127: P28.4@122.23,42.41 123.28,43.46 137.51,43.46 v1(140.59,46.54)
SD_POW: P28.10 U23.N3 | length 28.4
  F.Cu w0.127: P28.10@122.23,50.03 123.49,51.29 125.29,51.29 126.16,52.16 131.63,52.16 v1(131.64,52.15) ; v1(142.73,52.1) 142.73,51.65 143.71,50.67 145.55,50.67 146.4,49.82 147.08,49.82 147.48,49.42 U23.N3@147.6,49.42
  In4.Cu w0.127: v1(131.64,52.15) 132.69,52.15 133.61,51.23 139.23,51.23 140.1,52.1 v1(142.73,52.1)
SD_VOLT0: P28.8 U23.M5 | length 32.5
  F.Cu w0.127: U23.M5@148.4,47.82 v2(148.8,47.42)
  In4.Cu w0.127: P28.8@122.23,47.49 123.39,48.65 128.36,48.65 130.276,46.734 137.813,46.734 140.459,49.38 142.06,49.38 144.87,46.57 146.539,46.57 146.889,46.22 148.98,46.22 149.2,46.44 149.2,47.02 v2(148.8,47.42)
SDA: P22.24 R27.2 U19.5 U23.K14 | length 46.2
  F.Cu w0.127: U19.5@126.7,30.27 126.7,29.61 126.18,29.09 126.18,28.01 127.97,26.22 136.29,26.22 136.9,26.83 137.96,26.83 138.22,26.57 v1(140.01,26.57) ; P22.24@140.01,29.71 138.93,28.63 137.02,28.63 136.37,29.28 136.37,32.91 137.85,34.39 137.85,35.16 R27.2@138.36,35.67 140.25,37.56 147.63,37.56 150,39.93 U23.K14@150,40.62
  In4.Cu w0.127: v1(140.01,26.57) P22.24@140.01,29.71
SGPIO0: RN8.7 U23.K3 | length 22.7
  F.Cu w0.127: RN8.7@142.5,63.57 v1(143.1,63.57) ; U23.K3@150,49.42 v2(150.4,49.82)
  In4.Cu w0.127: v1(143.1,63.57) 143.1,63.23 146.31,60.02 151.83,60.02 152.272,59.578 152.272,55.422 150.4,53.55 v2(150.4,49.82)
SGPIO1: RN8.5 U23.K2 | length 16
  F.Cu w0.127: RN8.5@142.5,62.57 148.87,56.2 148.87,52.509 149.675,51.705 150.115,51.705 150.4,51.42 150.4,50.62 U23.K2@150,50.22
SGPIO2: RN6.7 U23.P11 | length 23.6
  F.Cu w0.127: RN6.7@134.35,55.32 134.35,54.9 135.69,53.56 135.69,45.278 138.728,42.24 140.62,42.24 140.95,41.91 145.325,41.91 146.435,43.02 U23.P11@146.8,43.02
SGPIO3: RN7.8 U23.L5 | length 13.6
  F.Cu w0.127: RN7.8@139.65,55.92 140.1,55.92 v1(141.13,54.89) ; v2(148.8,48.22) U23.L5@149.2,47.82
  In4.Cu w0.127: v1(141.13,54.89) 143.42,52.6 143.42,51.77 144.51,50.68 146.34,50.68 v2(148.8,48.22) ; 148.8,48.339 v2(148.8,48.22) ; 148.8,48.34 v2(148.8,48.22)
SGPIO4: RN7.5 U23.M8 | length 16.9
  F.Cu w0.127: RN7.5@138.15,55.92 138.15,52.02 v1(141.24,48.93) ; v2(148,45.82) U23.M8@148.4,45.42
  In4.Cu w0.127: v1(141.24,48.93) 143.86,46.31 146.44,46.31 146.93,45.82 v2(148,45.82)
SGPIO5: RN6.5 U23.K12 | length 33.3
  F.Cu w0.127: RN6.5@133.35,55.32 133.35,54.91 133.2,54.76 133.2,44.73 139.01,38.92 142.16,38.92 143.26,37.82 147.52,37.82 149.6,39.9 149.6,41.82 U23.K12@150,42.22
SGPIO6: RN6.6 U23.L13 | length 30.2
  F.Cu w0.127: RN6.6@133.85,55.32 133.85,54.91 133.48,54.54 133.48,44.85 138.99,39.34 148.27,39.34 148.8,39.87 148.8,41.02 U23.L13@149.2,41.42
SGPIO7: R21.2 U23.L1 | length 12.8
  F.Cu w0.127: R21.2@142.8,60.6 142.8,59.19 145.36,56.63 146.33,56.63 147.6,55.36 147.6,53.02 149.2,51.42 U23.L1@149.2,51.02
SGPIO8: RN8.6 U23.E4 | length 25.6
  F.Cu w0.127: RN8.6@142.5,63.07 v1(145.29,63.07) ; U23.E4@154,48.62 v2(154.4,49.02)
  In4.Cu w0.127: v1(145.29,63.07) 152.86,63.07 153.82,62.11 153.82,54.622 154,54.442 154,51.22 154.4,50.82 v2(154.4,49.02)
SGPIO9: RN7.6 U23.P5 | length 14.1
  F.Cu w0.127: RN7.6@138.65,55.92 138.65,55.51 138.404,55.264 138.404,52.156 141.21,49.35 144.92,49.35 146.45,47.82 U23.P5@146.8,47.82
SGPIO10: RN8.8 U23.J4 | length 25.3
  F.Cu w0.127: RN8.8@142.5,64.07 143,64.57 v1(143.7,64.57) ; v2(150.4,49.02) U23.J4@150.8,48.62
  In4.Cu w0.127: v1(143.7,64.57) 143.7,63 146.41,60.29 151.92,60.29 152.526,59.684 152.526,52.585 150.801,50.86 ; v2(150.4,49.02) 150.8,49.42 150.8,50.86
SGPIO11: RN7.7 U23.L6 | length 15.2
  F.Cu w0.127: RN7.7@139.15,55.92 139.15,55.49 139.67,54.97 140.46,54.97 v1(141.12,54.31) ; U23.L6@149.2,47.02 v2(149.6,47.42)
  In4.Cu w0.127: v1(141.12,54.31) 141.12,54.3 143.15,52.27 143.15,51.58 144.31,50.42 144.929,50.42 147.529,47.82 149.2,47.82 v2(149.6,47.42)
SGPIO12: RN6.8 U23.N10 | length 24.1
  F.Cu w0.127: RN6.8@134.85,55.32 134.85,54.9 135.95,53.8 135.95,45.377 138.833,42.494 140.726,42.494 141.05,42.17 145.225,42.17 146.475,43.42 147.2,43.42 U23.N10@147.6,43.82
SPIFI_CIPO: U20.2 U23.B12 | length 12.5
  F.Cu w0.127: U23.B12@156.4,42.22 156.8,41.82 158.29,41.82 158.754,41.356 160.914,41.356 163.985,38.285 U20.2@167.288,38.285
SPIFI_COPI: U20.5 U23.C10 | length 6.5
  F.Cu w0.127: U23.C10@155.6,43.82 156,43.42 v2(157.6,43.42) ; v1(158.95,40.83) 158.955,40.825 U20.5@160.1,40.825
  In4.Cu w0.127: v2(157.6,43.42) 157.6,42.71 158.95,41.36 v1(158.95,40.83)
SPIFI_SCK: U20.6 U23.B13 | length 4.5
  F.Cu w0.127: U23.B13@156.4,41.42 156.8,41.02 157.59,41.02 159.055,39.555 U20.6@160.1,39.555
SPIFI_SIO2: U20.3 U23.C11 | length 13.1
  F.Cu w0.127: U23.C11@155.6,43.02 156,42.62 158.21,42.62 158.96,41.87 161.13,41.87 163.445,39.555 U20.3@167.3,39.555
SPIFI_SIO3: U20.7 U23.C14 | length 5.5
  F.Cu w0.127: U23.C14@155.6,40.62 156.85,39.37 158.54,39.37 159.625,38.285 U20.7@160.1,38.285
SPIFI_{\C\S\}\: TP64.1 U20.1 U23.C9 | length 16.6
  F.Cu w0.127: U23.C9@155.6,44.62 156,44.22 157.53,44.22 157.822,44.512 159.278,44.512 159.57,44.22 159.772,44.22 160.66,43.332 v1(160.66,42.97) ; v1(166.14,37.02) 166.145,37.015 U20.1@167.3,37.015
  In4.Cu w0.127: v1(160.66,42.97) 160.66,42.5 v1(166.14,37.02)
  B.Cu w0.127: v1(166.14,37.02) 166.14,36.08 TP64.1@166.2,36.02
SSP1_CIPO: R145.1 TP53.1 U23.M2 | length 13.4
  F.Cu w0.127: R145.1@141.1,57.8 141.21,57.69 141.21,56.11 v1(141.25,56.07) 145.02,52.3 146.32,52.3 147.2,51.42 147.2,50.059 147.439,49.82 148,49.82 U23.M2@148.4,50.22
  B.Cu w0.127: TP53.1@140.4,56.02 140.45,56.07 v1(141.25,56.07)
SSP1_COPI: R140.2 TP52.1 U16.17 U17.19 U18.34 | length 109.9
  F.Cu w0.127: v1(98.2,31.15) 100.21,29.14 103.88,29.14 104.55,29.81 U17.19@104.55,31.582 ; v1(103.93,64.88) 103.93,64.23 103.61,63.91 103.45,63.91 102.9,63.36 102.9,62.19 v1(104.685,60.405) 105.305,60.405 105.65,60.06 U18.34@105.65,58.77 ; U16.17@138.837,61.67 v1(139.62,61.67) ; v1(144,51.8) 144.49,51.8 R140.2@144.55,51.74
  In4.Cu w0.127: v1(98.2,31.15) 98.2,37.99 97.72,38.47 97.72,55.04 102.72,60.04 104.32,60.04 v1(104.685,60.405) ; v1(103.93,64.88) 107.35,68.3 137.16,68.3 138.04,67.42 138.04,66.66 138.654,66.046 138.654,62.636 v1(139.62,61.67) 141.26,60.03 143.97,60.03 145.665,58.335 145.665,56.935 144.57,55.84 144.57,52.37 v1(144,51.8)
  B.Cu w0.127: TP52.1@98.2,30.22 v1(98.2,31.15)
SSP1_SCK: R141.2 TP51.1 U16.15 U17.18 U18.35 | length 115
  F.Cu w0.127: v1(98.9,31.14) 100.64,29.4 103.78,29.4 104.05,29.67 U17.18@104.05,31.582 ; v1(103.4,64.35) 103.4,64.24 102.62,63.46 102.62,61.71 104.79,59.54 v1(104.79,59.52) 105.09,59.22 105.09,58.83 U18.35@105.15,58.77 ; v1(135.96,55.22) 135.96,54.75 136.21,54.5 136.21,46.71 138.98,43.94 R141.2@138.98,43.92 ; U16.15@138.837,60.67 v1(139.62,60.67)
  In4.Cu w0.127: v1(98.9,31.14) 98.454,31.586 98.454,38.106 97.99,38.57 97.99,54.95 102.82,59.78 104.53,59.78 v1(104.79,59.52) ; v1(103.4,64.35) 103.99,64.35 107.67,68.03 137.07,68.03 137.78,67.32 137.78,66.56 138.4,65.94 138.4,61.89 v1(139.62,60.67) 137.57,58.62 135.45,58.62 135.22,58.39 135.22,57.96 135.96,57.22 v1(135.96,55.22)
  B.Cu w0.127: v1(103.4,64.35) 104.69,64.35 TP51.1@104.7,64.34
TCK: P26.4 R66.2 TP25.1 U23.G5 | length 24.4
  F.Cu w0.127: U23.G5@152.4,47.82 v2(152.8,48.22) ; v1(153.4,61.34) 156.17,64.11 156.17,64.38 R66.2@156.61,64.82 159.28,67.49 P26.4@159.28,68.175
  In4.Cu w0.127: v2(152.8,48.22) 153.2,48.62 153.2,50.57 153.74,51.11 153.74,54.34 153.56,54.52 153.56,60.78 153.4,60.94 v1(153.4,61.34)
  B.Cu w0.127: TP25.1@152.8,47.32 v2(152.8,48.22)
TDI: P26.8 TP28.1 U23.H4 | length 24.1
  F.Cu w0.127: v2(151.2,49.02) U23.H4@151.6,48.62 ; v1(152.09,61.46) 152.09,61.87 154.31,64.09 154.31,65.745 P26.8@156.74,68.175
  In4.Cu w0.127: v2(151.2,49.02) 151.6,49.42 151.6,50.94 153.04,52.38 153.04,60.51 v1(152.09,61.46)
  B.Cu w0.127: TP28.1@150.8,61.52 150.86,61.46 v1(152.09,61.46)
TDO: P26.6 R63.1 TP27.1 U23.J5 | length 25.7
  F.Cu w0.127: v2(150.4,48.22) U23.J5@150.8,47.82 ; v1(151.66,59.6) 151.66,60.44 152.98,61.76 152.98,62.4 154.57,63.99 154.57,64.735 P26.6@158.01,68.175
  In4.Cu w0.127: v2(150.4,48.22) 150,48.62 150,53.52 152.018,55.538 152.018,59.212 151.66,59.57 v1(151.66,59.6)
  B.Cu w0.127: TP27.1@158,66.82 158,68.165 P26.6@158.01,68.175
TMS: P26.2 TP26.1 U23.K5 | length 26.7
  F.Cu w0.127: v2(149.6,48.22) U23.K5@150,47.82 ; v1(151.5,58.85) 159.92,67.27 159.92,67.545 P26.2@160.55,68.175
  In4.Cu w0.127: v2(149.6,48.22) 149.2,48.62 149.2,52.12 148.97,52.35 148.97,52.85 151.76,55.64 151.76,58.59 v1(151.5,58.85)
  B.Cu w0.127: TP26.1@150.9,58.22 150.9,58.25 v1(151.5,58.85)
TRIGGER.IN: P28.16 R127.1 U16.48 U30.3 U33.13 | length 68.1
  F.Cu w0.127: v1(130.46,30.87) 131.06,30.27 U33.13@131.613,30.27 ; U16.48@131.963,59.67 131.36,59.67 v1(130.46,58.77) 123.35,58.77 P28.16@122.23,57.65 120.92,56.34 120.92,39.34 121.71,38.55 127.5,38.55 127.9,38.15 129.08,38.15 v1(130.46,36.77) U30.3@132.05,36.77 ; v1(136.61,54.79) 136.61,46.99 R127.1@138.98,44.62
  In4.Cu w0.127: v1(130.46,30.87) v1(130.46,36.77) ; v1(130.46,58.77) 130.46,58.329 133.999,54.79 v1(136.61,54.79)
TRIGGER.OUT: P28.15 R6.2 U16.2 U30.1 U33.12 | length 61.1
  F.Cu w0.127: v1(130.94,33.23) 130.67,32.96 130.67,31.42 131.32,30.77 U33.12@131.613,30.77 ; U30.1@132.05,38.07 131.49,38.07 v1(130.71,37.29) 129.58,38.42 128,38.42 127.61,38.81 121.81,38.81 121.18,39.44 121.18,55.64 121.93,56.39 123.51,56.39 P28.15@124.77,57.65 131.15,57.65 131.25,57.55 132.71,57.55 132.87,57.71 132.87,58.36 133.15,58.64 U16.2@133.15,58.983 ; v1(141.16,36.82) R6.2@142.18,36.82
  In4.Cu w0.127: v1(130.71,37.29) 130.94,37.06 130.94,36.27 ; v1(130.94,33.23) 130.94,36.27 ; v1(141.16,36.82) 136.4,36.82 135.85,36.27 130.94,36.27
TUNE: C47.2 R25.1 U17.32 | length 8.1
  F.Cu w0.127: U17.32@107.737,35.77 108.54,35.77 108.79,36.02 C47.2@108.83,36.02 108.83,36.01 109.22,35.62 109.68,35.62 v1(109.94,35.36) ; R25.1@108.52,30.52 108.64,30.52 109.94,31.82 v1(109.94,32.77) ; C47.2@108.83,35.92 C47.2@108.83,35.95
  In4.Cu w0.127: v1(109.94,32.77) v1(109.94,35.36)
TX_AMP_IN: C59.1 U12.5 | length 3.1
  F.Cu w0.25: U12.5@83.05,35.32 83.05,35.42 83.25,35.62
  F.Cu w0.364: C59.1@82.02,37.82 83.25,36.59 83.25,35.62
TX_AMP_OUT: C62.2 U14.3 | length 2.4
  F.Cu w0.25: 75.45,35.62 75.65,35.42 U14.3@75.65,35.32
  F.Cu w0.364: 75.45,35.62 75.35,35.72 75.35,37.25 C62.2@75.6,37.5
TX_EN: JP1.2 R24.1 TP43.1 U39.2 | length 48.9
  F.Cu w0.127: U39.2@100.65,28.02 108.44,28.02 111.06,30.64 111.06,30.98 111.55,31.47 R24.1@112.13,31.47 112.13,31.474 112.516,31.86 115.47,31.86 119.97,27.36 119.97,26.67 121.096,25.544 137.974,25.544 138.28,25.85 141.47,25.85 v1(141.75,25.57) 141.8,25.52 142.8,24.52 JP1.2@142.8,24.32
  B.Cu w0.127: v1(141.75,25.57) 142.4,26.22 TP43.1@142.4,26.32
TX_MIX_EN: TP66.1 U38.5 U39.4 | length 50.9
  F.Cu w0.127: U38.5@76.6,50.995 76.6,50.92 77.35,50.17 79.16,50.17 v1(80.32,49.01) ; v1(98.07,28.67) U39.4@98.75,28.67
  In4.Cu w0.127: v1(80.32,49.01) 80.71,48.62 89.3,48.62 92.65,51.97 94.34,51.97 96.86,49.45 96.86,43.52 93.36,40.02 93.36,31.019 95.269,29.11 97.63,29.11 v1(98.07,28.67)
  B.Cu w0.127: v1(80.32,49.01) 81,48.33 TP66.1@81,48.32
TX_MIX_IN: U6.3 U7.3 | length 6
  F.Cu w0.364: U6.3@88.76,46.26 89.641,45.379 94.191,45.379 U7.3@94.34,45.23
TX_MIX_OUT: C189.1 U1.7 | length 3.8
  F.Cu w0.364: C189.1@82.42,44.12 86.19,44.12
TXBB.I+: R8.2 R17.1 R119.2 TP57.1 U17.45 | length 12.4
  F.Cu w0.127: v1(99,46.72) R119.2@99.58,46.72
  F.Cu w0.203: R8.2@99.4,47.55 99.5,47.45 99.5,45.98 R17.1@99.4,45.88 99.76,45.88 99.931,45.709 99.931,43.682 103.031,40.582 103.031,38.477 U17.45@103.05,38.457
  B.Cu w0.127: TP57.1@99,45.82 v1(99,46.72)
TXBB.I-: R9.2 R16.1 R119.1 TP56.1 U17.44 | length 12.2
  F.Cu w0.127: R119.1@100.22,46.72 v1(100.8,46.72)
  F.Cu w0.203: R9.2@100.4,47.55 100.3,47.45 100.3,45.98 R16.1@100.4,45.88 100.74,45.88 100.9,45.72 100.9,43.247 103.409,40.738 103.409,38.931 103.55,38.79 U17.44@103.55,38.457
  B.Cu w0.127: v1(100.8,46.72) TP56.1@100.8,47.62
TXBB.Q+: R10.2 R15.1 R118.2 TP58.1 U17.43 | length 9.8
  F.Cu w0.127: v1(102.3,45.12) R118.2@102.88,45.12
  F.Cu w0.203: R10.2@102.7,45.95 102.8,45.85 102.8,44.38 R15.1@102.7,44.28 103.04,44.28 103.171,44.149 103.171,42.721 103.811,42.081 103.811,39.052 104.05,38.813 U17.43@104.05,38.457
  B.Cu w0.127: TP58.1@102.3,44.22 v1(102.3,45.12)
TXBB.Q-: R13.2 R14.1 R118.1 TP59.1 U17.42 | length 9.6
  F.Cu w0.127: R118.1@103.52,45.12 v1(104.1,45.12)
  F.Cu w0.203: R13.2@103.7,45.95 103.6,45.85 103.6,44.38 R14.1@103.7,44.28 104.02,44.28 104.189,44.111 104.189,39.208 104.55,38.847 U17.42@104.55,38.457
  B.Cu w0.127: v1(104.1,45.12) TP59.1@104.1,46.02
TXIF: T4.2 U2.5 | length 0.7
  F.Cu w0.364: U2.5@96.52,33.27 97.23,33.27
TXIF+: C104.1 U17.9 | length 1.2
  F.Cu w0.203: C104.1@99.77,33.82 99.8,33.82 99.961,33.659 100.369,33.659 100.48,33.77 U17.9@100.863,33.77
TXIF-: C111.1 U17.10 | length 1.2
  F.Cu w0.203: C111.1@99.77,33.12 99.8,33.12 99.961,33.281 100.852,33.281 U17.10@100.863,33.27
TXIF_BALUN+: C111.2 L9.1 T4.3 | length 1.4
  F.Cu w0.203: 97.94,33.28 98.269,33.281 L9.1@98.4,33.15 98.531,33.281 98.939,33.281 99.1,33.12 C111.2@99.13,33.12
TXIF_BALUN-: C104.2 L9.2 T4.4 | length 1.4
  F.Cu w0.203: 97.94,33.66 98.269,33.659 L9.2@98.4,33.79 98.531,33.659 98.939,33.659 99.1,33.82 C104.2@99.13,33.82
U0_RXD: P22.19 U23.M13 | length 11
  F.Cu w0.127: v2(148,40.02) 148,41.02 U23.M13@148.4,41.42
  In4.Cu w0.127: P22.19@145.09,32.25 148.53,35.69 148.53,39.49 v2(148,40.02)
U0_TXD: P22.20 U23.N14 | length 14.3
  F.Cu w0.127: v2(147.35,40.02) 147.6,40.27 U23.N14@147.6,40.62
  In4.Cu w0.127: P22.20@145.09,29.71 144.01,30.79 144.01,32.66 144.7,33.35 145.831,33.35 148.27,35.789 148.27,39.1 v2(147.35,40.02)
unconnected-(D6-A1-Pad1): D6.1
unconnected-(D6-K1-Pad2): D6.2
unconnected-(D8-A2-Pad3): D8.3
unconnected-(D8-K2-Pad4): D8.4
unconnected-(J1-SBU1-PadA8): J1.A8
unconnected-(J1-SBU2-PadB8): J1.B8
unconnected-(P26-Pin_7-Pad7): P26.7
unconnected-(Q7B-B2-Pad5): Q7.5
unconnected-(Q7B-C2-Pad3): Q7.3
unconnected-(Q7B-E2-Pad4): Q7.4
unconnected-(RN2-R1.1-Pad1): RN2.1
unconnected-(RN2-R1.2-Pad8): RN2.8
unconnected-(RN3-R1.1-Pad1): RN3.1
unconnected-(RN3-R1.2-Pad8): RN3.8
unconnected-(U1-N{slash}C-Pad2): U1.2
unconnected-(U1-N{slash}C-Pad8): U1.8
unconnected-(U2-N{slash}C-Pad2): U2.2
unconnected-(U2-N{slash}C-Pad8): U2.8
unconnected-(U4-EXT_LO-Pad2): U4.2
unconnected-(U4-EXT_LO_DEC-Pad3): U4.3
unconnected-(U4-GPO1{slash}ADD1-Pad15): U4.15
unconnected-(U4-GPO2{slash}ADD2-Pad16): U4.16
unconnected-(U4-GPO3{slash}FM-Pad25): U4.25
unconnected-(U4-NC-Pad11): U4.11
unconnected-(U4-NC-Pad13): U4.13
unconnected-(U4-NC-Pad14): U4.14
unconnected-(U4-NC-Pad17): U4.17
unconnected-(U4-NC-Pad18): U4.18
unconnected-(U4-NC-Pad20): U4.20
unconnected-(U4-NC-Pad21): U4.21
unconnected-(U17-B1-Pad23): U17.23
unconnected-(U17-B2-Pad11): U17.11
unconnected-(U17-B3-Pad8): U17.8
unconnected-(U17-B4-Pad34): U17.34
unconnected-(U17-B5-Pad14): U17.14
unconnected-(U17-B6-Pad3): U17.3
unconnected-(U17-B7-Pad6): U17.6
unconnected-(U17-CLOCKOUT-Pad21): U17.21
unconnected-(U17-CTUNE-Pad29): U17.29
unconnected-(U18-NC-Pad38): U18.38
unconnected-(U19-XB-Pad2): U19.2
unconnected-(U23-NC-PadB8): U23.B8
unconnected-(U23-P4_0-PadD4): U23.D4
unconnected-(U23-P4_8-PadD2): U23.D2
unconnected-(U23-P5_0-PadL2): U23.L2
unconnected-(U23-P6_0-PadM10): U23.M10
unconnected-(U23-P6_10-PadG13): U23.G13
unconnected-(U23-P8_3-PadH3): U23.H3
unconnected-(U23-P8_8-PadK1): U23.K1
unconnected-(U23-PA_0-PadL10): U23.L10
unconnected-(U23-PB_2-PadB11): U23.B11
unconnected-(U23-PB_4-PadB10): U23.B10
unconnected-(U23-RTC_ALARM-PadA10): U23.A10
unconnected-(U23-USB0_ID-PadG2): U23.G2
unconnected-(U23-USB1_DM-PadE11): U23.E11
unconnected-(U23-USB1_DP-PadD11): U23.D11
unconnected-(U23-WAKEUP1-PadC8): U23.C8
unconnected-(U23-WAKEUP2-PadE5): U23.E5
unconnected-(U33-A6-Pad2): U33.2
unconnected-(X1-NC-Pad1): X1.1
USB0_VBUS: R62.1 R65.2 U23.E1 | length 31.2
  F.Cu w0.127: U23.E1@154,51.02 154,55.72 154.85,56.57 v1(155.87,56.57) ; v1(161.78,68.35) 161.78,71.4 R65.2@166,75.62 165.99,75.63 R62.1@165.99,76.62
  In4.Cu w0.127: v1(155.87,56.57) 155.87,62.44 v1(161.78,68.35)
USB_DATA.D+: FL1.3 U23.E2 | length 27.5
  F.Cu w0.127: 153.6,51.34 153.6,50.62 U23.E2@154,50.22
  F.Cu w0.25: 153.67,51.36 153.67,51.815 153.388,52.096 153.388,58.058 166.961,71.632 FL1.3@167.15,71.632
USB_DATA.D-: FL1.1 U23.F2 | length 28.1
  F.Cu w0.127: 152.8,51.34 152.8,50.62 U23.F2@153.2,50.22
  F.Cu w0.25: 152.73,51.36 152.73,51.815 153.011,52.096 153.011,58.221 166.799,72.008 FL1.1@167.15,72.008